# EAGLE board LED MATRIX (EAGLE 9.7.0)

Size 160.14 x 89.34 mm. Coordinates in mm from the lower left corner, seen from the top.
Outline: 0,0 160.14,0 160.14,89.34 0,89.34 0,0
Copper layers (1*16): Top 0.035mm / dielectric 1.5mm / Bottom 0.035mm
Design rules "default": minimum track width 6mil, minimum drill 0.35mm, track to track 6mil, track to pad 6mil, pad to pad 6mil, via to via 6mil, smd to smd 6mil, copper to edge 40mil, drill to drill 6mil, minimum pad ring 10mil, minimum via ring 8mil, stop-mask expansion 4mil, vias tented up to drill 0mil, thermal gap 10mil

## Footprints (pad centres in the part's own frame; a part is rotated, then mirrored left to right if it is on the bottom)
LEDRD254W60D565H860B_G = drill 0.981 pad 1.581: 1 -1.27,0; 2 1.27,0
ARDUINO-UNO-R3-SHIELD = drill 1.016 pad 1.88: 3.3V 24.13,-2.54; 5V 24.13,0; A0 24.13,12.7; A1 24.13,15.24; A2 24.13,17.78; A3 24.13,20.32; A4 24.13,22.86; A5 24.13,25.4; AREF -24.13,-13.97; D2 -24.13,20.32; D3 -24.13,17.78; D4 -24.13,15.24; D5 -24.13,12.7; D6 -24.13,10.16; D7 -24.13,7.62; D8 -24.13,3.81; D9 -24.13,1.27; D10 -24.13,-1.27; D11 -24.13,-3.81; D12 -24.13,-6.35; D13 -24.13,-8.89; GND@0 24.13,2.54; GND@1 24.13,5.08; GND@2 -24.13,-11.43; IOREF 24.13,-7.62; NC 24.13,-10.16; RES 24.13,-5.08; RX -24.13,25.4; SCL -24.13,-19.05; SDA -24.13,-16.51; TX -24.13,22.86; VIN 24.13,7.62

## Placement (x,y rotation side)
D1  GREEN  [LEDRD254W60D565H860B_G]  99.91,70.37 180 top
D2  GREEN  [LEDRD254W60D565H860B_G]  112.9,71.03 180 top
D3  GREEN  [LEDRD254W60D565H860B_G]  126.2,70.48 180 top
D4  GREEN  [LEDRD254W60D565H860B_G]  99.19,54.64 180 top
D6  GREEN  [LEDRD254W60D565H860B_G]  99.65,38.53 180 top
D7  GREEN  [LEDRD254W60D565H860B_G]  99.85,22.43 180 top
D8  GREEN  [LEDRD254W60D565H860B_G]  100.26,8.05 180 top
D9  GREEN  [LEDRD254W60D565H860B_G]  113.01,55.58 180 top
D10  GREEN  [LEDRD254W60D565H860B_G]  112.08,38.64 180 top
D11  GREEN  [LEDRD254W60D565H860B_G]  112.27,23.31 180 top
D12  GREEN  [LEDRD254W60D565H860B_G]  112.64,8.27 180 top
D13  GREEN  [LEDRD254W60D565H860B_G]  125.96,55.22 180 top
D14  GREEN  [LEDRD254W60D565H860B_G]  125.11,38.71 180 top
D15  GREEN  [LEDRD254W60D565H860B_G]  124.99,23.43 180 top
D16  GREEN  [LEDRD254W60D565H860B_G]  124.62,8.27 180 top
D17  GREEN  [LEDRD254W60D565H860B_G]  139.02,70.5 180 top
D18  GREEN  [LEDRD254W60D565H860B_G]  140.15,55.58 180 top
D20  GREEN  [LEDRD254W60D565H860B_G]  139.41,38.71 180 top
D21  GREEN  [LEDRD254W60D565H860B_G]  139.17,23.31 180 top
D22  GREEN  [LEDRD254W60D565H860B_G]  138.56,8.27 180 top
D24  GREEN  [LEDRD254W60D565H860B_G]  153.59,70.26 180 top
D25  GREEN  [LEDRD254W60D565H860B_G]  153.84,55.22 180 top
D26  GREEN  [LEDRD254W60D565H860B_G]  154.08,38.71 180 top
D27  GREEN  [LEDRD254W60D565H860B_G]  153.72,23.55 180 top
D28  GREEN  [LEDRD254W60D565H860B_G]  153.59,8.52 180 top
U1  ARDUINO-UNO-R3-SHIELD  [ARDUINO-UNO-R3-SHIELD]  29.84,41.46 180 top

## Library data of the parts
D1-D4 D6-D18 D20-D22 D24-D28 = Tinkercad; CATEGORY: Opto-Electronic; SUB-CATEGORY: LED; VALUE: LED_GREEN
U1 = Tinkercad

## Nets
U1_D2: D17.1 D18.1 D20.1 D21.1 D22.1 U1.D2
U1_D3: D3.1 D13.1 D14.1 D15.1 D16.1 U1.D3
U1_D4: D2.1 D9.1 D10.1 D11.1 D12.1 U1.D4
U1_D5: D1.1 D4.1 D6.1 D7.1 D8.1 U1.D5
U1_D6: D8.2 D12.2 D16.2 D22.2 D28.2 U1.D6
U1_D7: D7.2 D11.2 D15.2 D21.2 D27.2 U1.D7
U1_D8: D6.2 D10.2 D14.2 D20.2 D26.2 U1.D8
U1_D9: D4.2 D9.2 D13.2 D18.2 D25.2 U1.D9
U1_D10: D1.2 D2.2 D3.2 D17.2 D24.2 U1.D10
U1_TX: D24.1 D25.1 D26.1 D27.1 D28.1 U1.TX

## Tracks (layer width: path | path; a pad name or v marks a point on that pad's centre or on a via)
U1_D2  (5 unrouted)
U1_D3  (5 unrouted)
U1_D4  (5 unrouted)
U1_D5  (5 unrouted)
U1_D6  (5 unrouted)
U1_D7  (5 unrouted)
U1_D8  (5 unrouted)
U1_D9  (5 unrouted)
U1_D10  (5 unrouted)
U1_TX  (5 unrouted)